# Altium PCB PCB1.PcbDoc
Units mm, origin at the board's own origin, x right, y up, seen from the top; angles counter-clockwise.
Board outline 88.5 x 69.5 mm, 2 copper layers (Top Layer, Bottom Layer); 11 components, 28 nets, 93 pads, 0 vias.
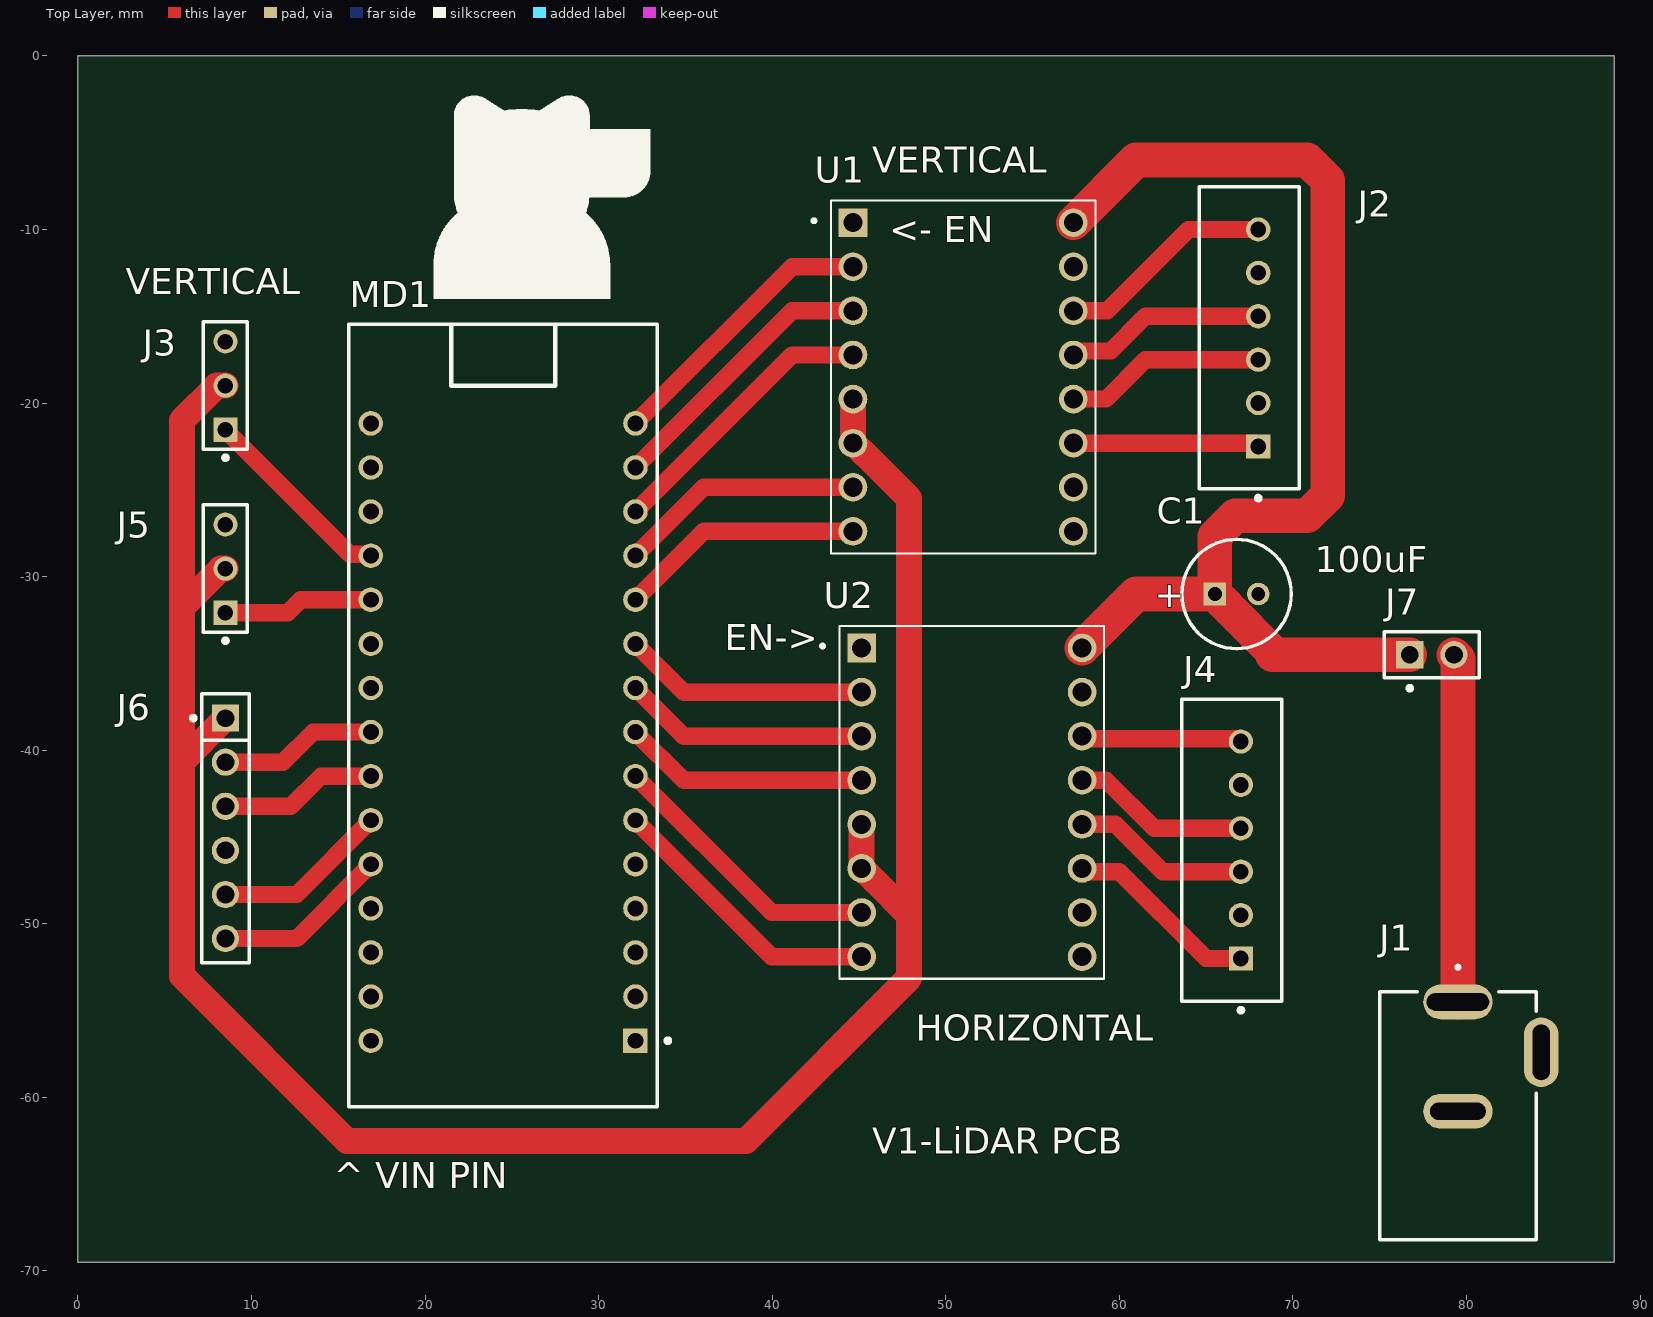
[diagram p0: Top Layer view]
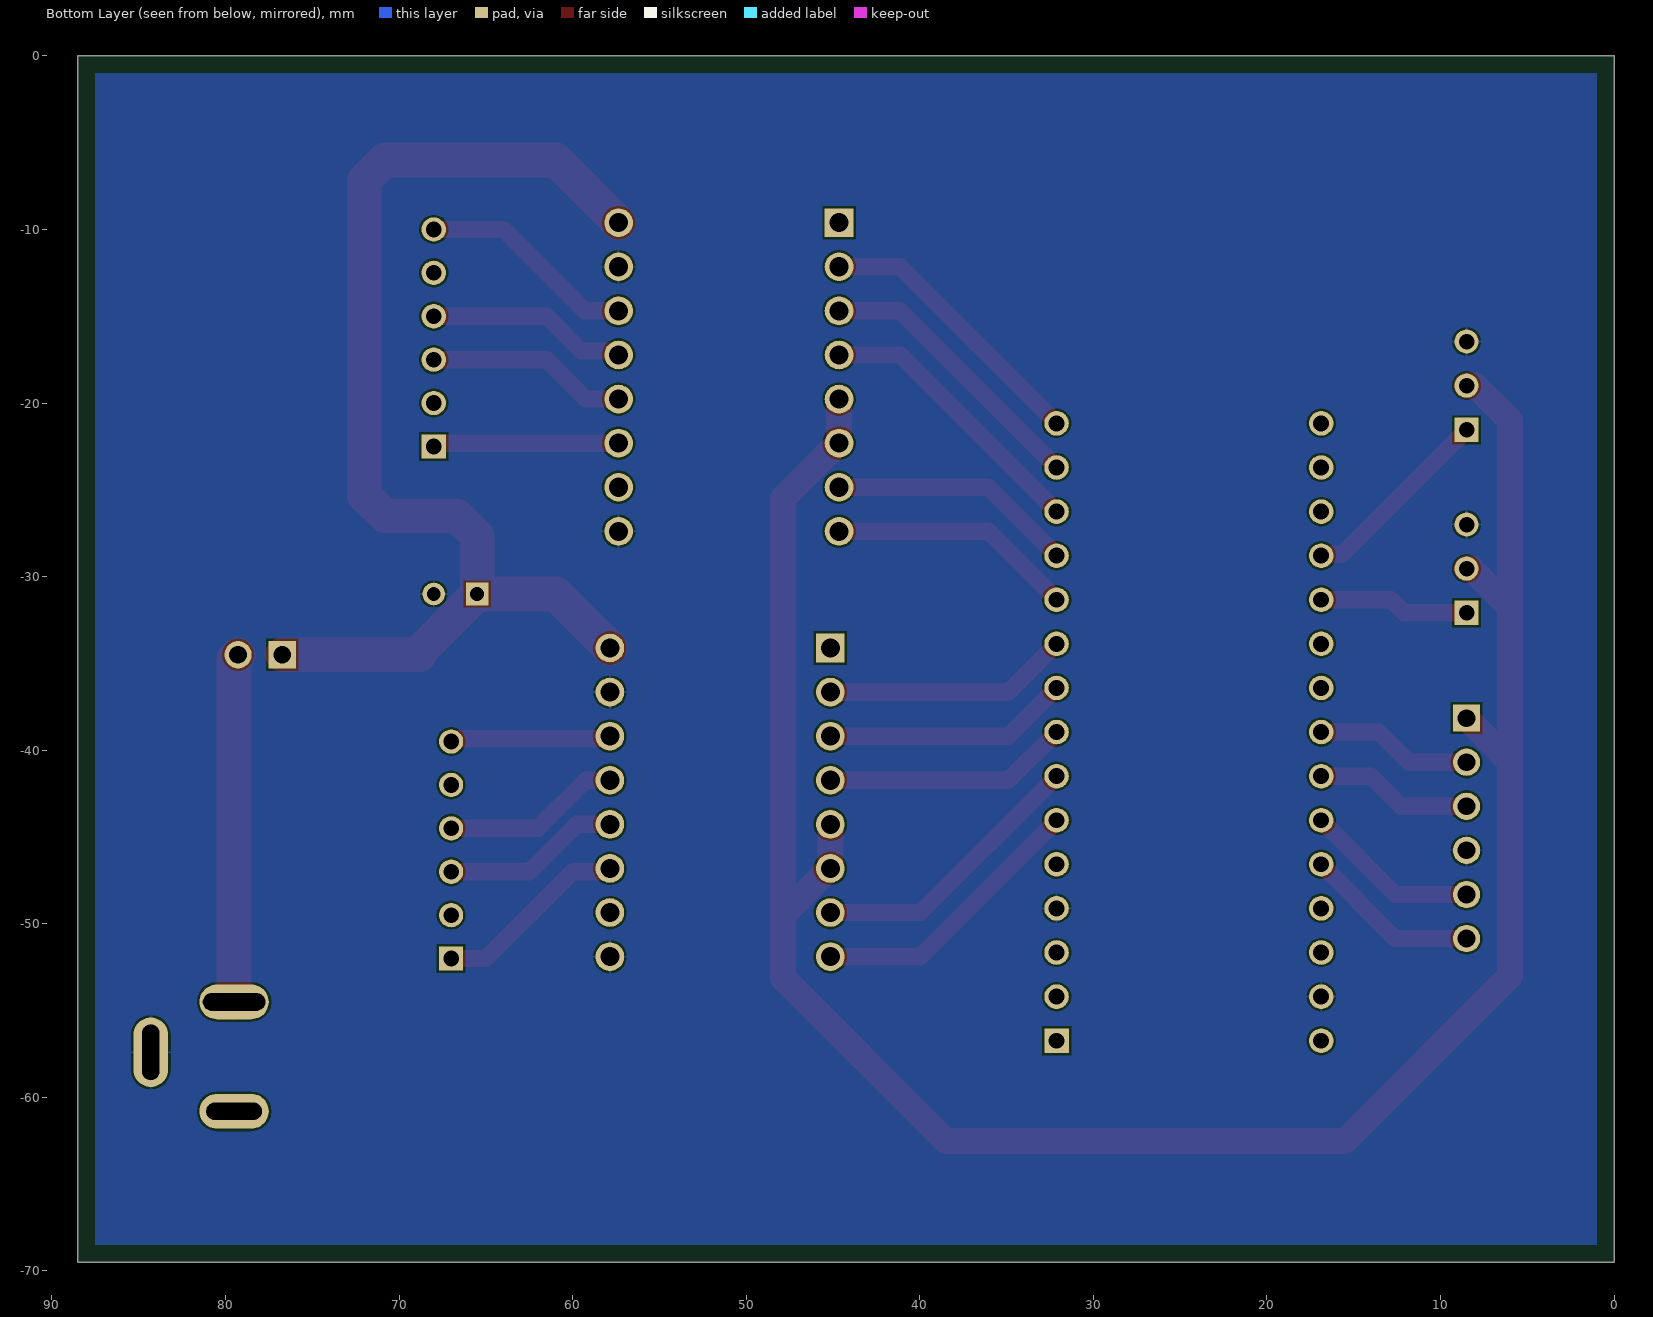
[diagram p1: Bottom Layer view, seen from below]
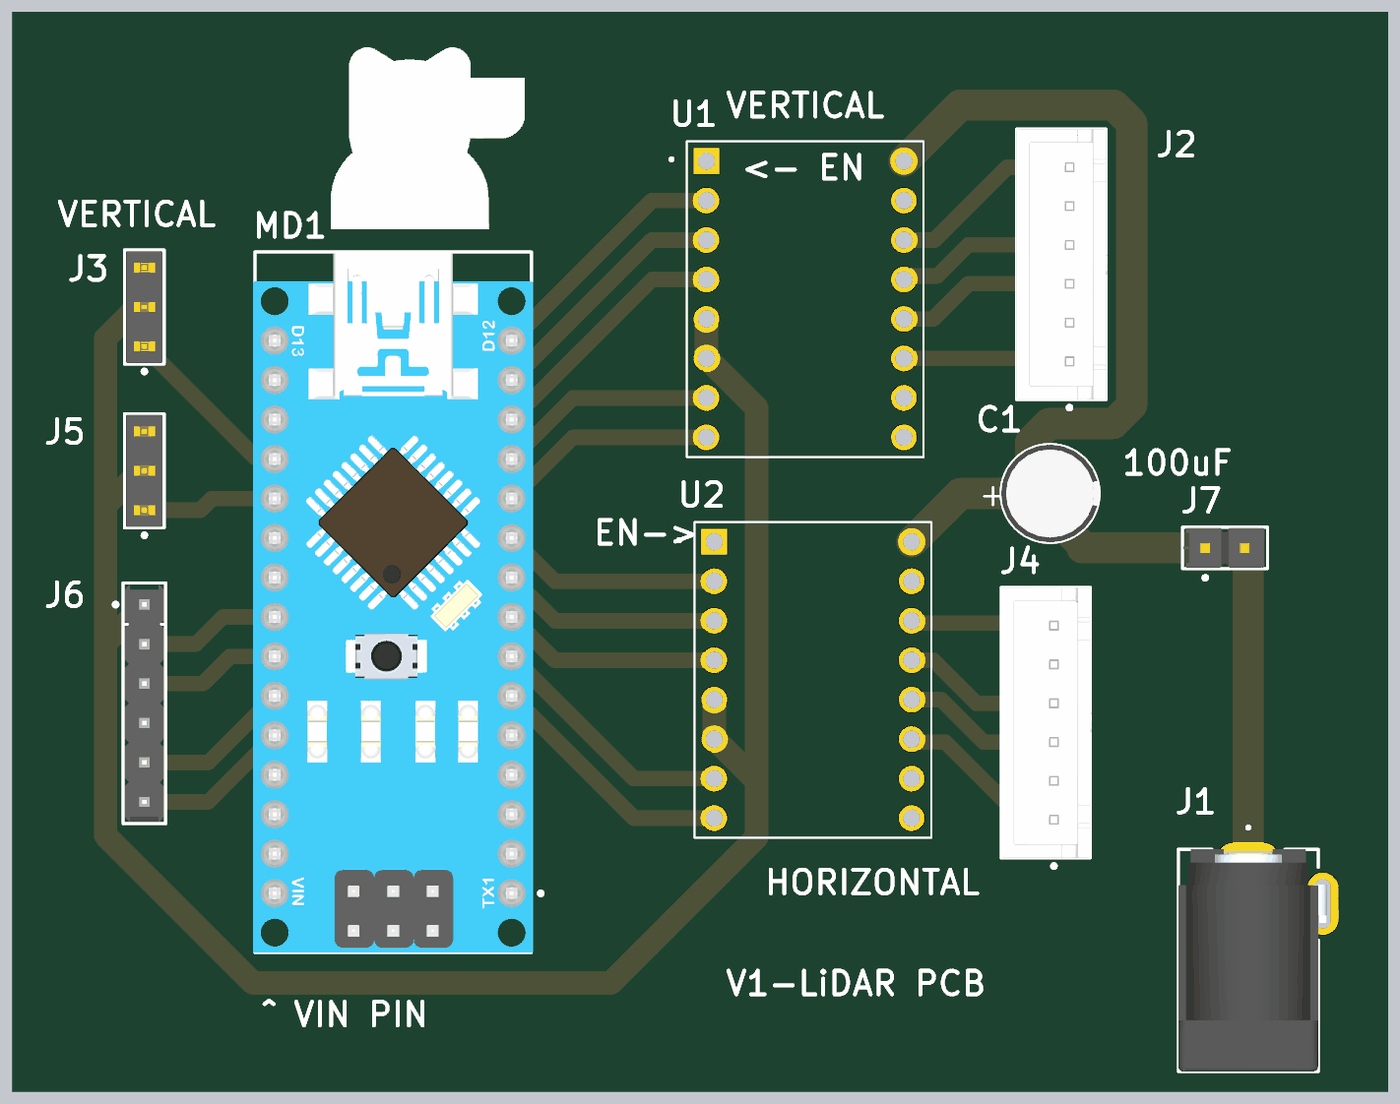
[diagram p2: 3D render of the assembled board from above, using the file's embedded part models]

## Layer stack, top to bottom
Top Solder: solder mask 0.0102, Solder Resist, Dk 3.5
Top Layer: signal copper 0.0356
Dielectric 1: dielectric 0.32, FR-4, Dk 4.8
Bottom Layer: signal copper 0.0356
Bottom Solder: solder mask 0.0102, Solder Resist, Dk 3.5

## Board outline
0,-69.5 0,0 88.5,0 88.5,-69.5

## Design rules (kind name [scope] priority, off if disabled: settings)
BoardOutlineClearance [All] p1: gap=0.2 ignorepadtopadclearanceinfootprint=FALSE
Clearance [All] p1: gap=0.127 ignorepadtopadclearanceinfootprint=TRUE except(0.254: Arc-Hole Track-Hole SMDPad-Hole THPad-Hole Via-Hole Fill-Hole Poly-Hole Region-Hole Text-Hole)
ComponentClearance [All] p1: gap=0.127 collisioncheckmode=3 verticalgap=0.127 showdistances=TRUE
DiffPairsRouting [All] p1: maxlimit=0.254 minlimit=0.127 mostfreqgap=0.127 toplayer_minwidth=0.127 toplayer_maxwidth=25.4 toplayer_prefwidth=0.127 bottomlayer_minwidth=0.127 bottomlayer_maxwidth=25.4 bottomlayer_prefwidth=0.127 maxuncoupledlength=12.7
Height [All] p1: minheight=0 maxheight=1816.048 prefheight=12.7
HoleSize [All] p1: absolutevalues=TRUE maxlimit=6.3 minlimit=0.3 maxpercent=80.000 minpercent=20.000
HoleToHoleClearance [All] p1: gap=0.254 allowstackedmicrovias=FALSE
MinimumAnnularRing [All] p1: minimumring=0.152
MinimumSolderMaskSliver [All] p1: minsoldermaskwidth=0.152
PlaneClearance [All] p1: clearance=0.127
PlaneConnect PlaneConnectPowerPads [InPadClass('PowerPads')] p1: planeconnectstyle=Direct reliefexpansion=0.508 reliefentries=4 reliefconductorwidth=0.254 reliefairgap=0.254
PlaneConnect [All] p2: pad.planeconnectstyle=Relief pad.reliefexpansion=0.3 pad.reliefentries=4 pad.reliefconductorwidth=0.127 pad.reliefairgap=0.127 via.planeconnectstyle=Direct via.reliefexpansion=0.3 via.reliefentries=4 via.reliefconductorwidth=0.127 via.reliefairgap=0.127
PolygonConnect PolygonConnectPowerPads [All vs (InPadClass('PowerPads'))] p1: connectstyle=Direct reliefconductorwidth=0.254 reliefentries=4 polygonreliefangle="90 Angle" airgapwidth=0.254
PolygonConnect [All] p2: thpad.connectstyle=Relief thpad.reliefconductorwidth=0.127 thpad.reliefentries=4 thpad.polygonreliefangle="90 Angle" thpad.airgapwidth=0.127 smdpad.connectstyle=Relief smdpad.reliefconductorwidth=0.127 smdpad.reliefentries=4 smdpad.polygonreliefangle="90 Angle" smdpad.airgapwidth=0.127 via.connectstyle=Direct via.reliefconductorwidth=0.127 via.reliefentries=4 via.polygonreliefangle="90 Angle" via.airgapwidth=0.127
RoutingVias [All] p1: holewidth=0.3 width=0.6 viastyle="Through Hole" minholewidth=0.3 minwidth=0.6 maxholewidth=0.6 maxwidth=6.6
SilkToSilkClearance [All] p1: silktosilkclearance=0.127
SilkToSolderMaskClearance [IsPad] p1: minsilkscreentomaskgap=0.127 clearancetoexposedcopper=TRUE
SolderMaskExpansion [All] p1: expansion=0.051 istentingtop=FALSE
UnRoutedNet [All] p1: checkbadconnections=TRUE
Width Width_10mil [All] p1: maxlimit=25.4 minlimit=0.254 preferedwidth=0.254 minimp=50.000000 maximp=50.000000 favimp=50.000000
Width Width_6mil [All] p2: maxlimit=25.4 minlimit=0.152 preferedwidth=0.152 minimp=50.000000 maximp=50.000000 favimp=50.000000
Width Power_20mil [All] p3: maxlimit=25.4 minlimit=0.508 preferedwidth=0.508 minimp=50.000000 maximp=50.000000 favimp=50.000000
Width Power_12mil [All] p4: maxlimit=25.4 minlimit=0.305 preferedwidth=0.305 minimp=50.000000 maximp=50.000000 favimp=50.000000
Width Width_5mil [All] p5: maxlimit=25.4 minlimit=0.127 preferedwidth=0.127 minimp=50.000000 maximp=50.000000 favimp=50.000000
19 further rules are at their usual default settings.

## Components (designator, comment, footprint, x,y, rotation, side; value= is the part's Value field where it differs from the comment)
C1 "100_uF_ELECTROLYTIC" CAPPR55-250-1120X630X1220 66.75,-31 r0 top
J1 "DC-005 5.5x2.5mm" GCT_DCJ250-10-A-XX-X_REVA 79.5,-61.05 r0 top
J2 "XH-6 NEMA V" FP-B6B-XH-A_LF_SN-MFG 67.475,-16.25 r90 top
J3 "KY-003_HORIZONTAL" FP-87224-3-MFG 8.5,-19 r90 top
J4 "XH-6 NEMA H" FP-B6B-XH-A_LF_SN-MFG 66.475,-45.75 r90 top
J5 "KY-003_VERTICAL" FP-87224-3-MFG 8.5,-29.54 r90 top
J6 "TF_LUNA" FP-22-28-4060-MFG 8.5,-44.5 r270 top
J7 "SWITCH" FP-TSW-102-07-S-S-MFG 78,-34.5 r0 top
MD1 "ARDUINO NANO" FP-A000005-MFG 24.5,-38 r180 top
U1 "DRV8825_STEPPER_MOTOR_DRIVER_CARRIER_VERTICAL" IC_DRV8825_STEPPER_MOTOR_DRIVER_CARRIER 51,-18.5 r0 top
U2 "DRV8825_STEPPER_MOTOR_DRIVER_CARRIER_HORIZONTAL" IC_DRV8825_STEPPER_MOTOR_DRIVER_CARRIER 51.5,-43 r0 top

## Footprints (in the part's own frame and the unit in brackets; to place one, negate y for a bottom-side part, rotate by r counter-clockwise, add the part's x,y. Pads: shape width x height; smd on the part's side, far side on the other; paste and mask are expansions set on the pad)
CAPPR55-250-1120X630X1220 [mm] "THD, 2-Leads, Dia 6.3mm, Body Length 11.2mm"
  rect 1.3x1.3 hole 0.8: 1(-1.25,0)
  round 1.3 hole 0.8: 2(1.25,0)
  silkscreen extent -3.15,-3.15 3.15,3.15, body extent -3.15,-3.15 3.16,3.15, height 12.21
FP-22-28-4060-MFG [mm]
  rect 1.57x1.57 hole 1.02 paste-2539.97 mask+0: 1(-6.35,0)
  round 1.57 hole 1.02 paste-2539.97 mask+0: 2(-3.81,0) 3(-1.27,0) 4(1.27,0) 5(3.81,0) 6(6.35,0)
  silkscreen extent -7.75,-1.97 7.75,1.37, body extent -7.85,-1.47 7.85,1.47, height 0.25
FP-87224-3-MFG [mil]
  rect 54.69x54.69 hole 35 paste-99999 mask+0: 1(-100,0)
  round 54.69 hole 35 paste-99999 mask+0: 2(0,0) 3(100,0)
  silkscreen extent -168,-50 145,50, body extent -148,-54 148,54, height 10
FP-A000005-MFG [mil]
  rect 55.67x55.67 hole 35.98 paste-99999 mask+0: 1(-300,737.5)
  round 55.67 hole 35.98 paste-99999 mask+0: 2(-300,637.5) 3(-300,537.5) 4(-300,437.5) 5(-300,337.5) 6(-300,237.5) 7(-300,137.5) 8(-300,37.5) 9(-300,-62.5) 10(-300,-162.5) 11(-300,-262.5) 12(-300,-362.5) 13(-300,-462.5) 14(-300,-562.5) 15(-300,-662.5) 16(300,-662.5) 17(300,-562.5) 18(300,-462.5) 19(300,-362.5) 20(300,-262.5) 21(300,-162.5) 22(300,-62.5) 23(300,37.5) 24(300,137.5) 25(300,237.5) 26(300,337.5) 27(300,437.5) 28(300,537.5) 29(300,637.5) 30(300,737.5)
  silkscreen extent -379,-888 350,887, body extent -354,-891 354,891, height 10
FP-B6B-XH-A_LF_SN-MFG [mm]
  rect 1.4x1.4 hole 0.9 paste-2539.97 mask+0: 1(-6.25,-0.525)
  round 1.4 hole 0.9 paste-2539.97 mask+0: 2(-3.75,-0.525) 3(-1.25,-0.525) 4(1.25,-0.525) 5(3.75,-0.525) 6(6.25,-0.525)
  silkscreen extent -9.35,-2.88 8.7,2.88, body extent -8.7,-2.98 8.7,2.88, height 7
FP-TSW-102-07-S-S-MFG [mm]
  rect 1.57x1.57 hole 1.02 paste-2539.97 mask+0: 1(-1.27,0)
  round 1.57 hole 1.02 paste-2539.97 mask+0: 2(1.27,0)
  silkscreen extent -2.73,-2.05 2.73,1.34, body extent -2.83,-1.44 2.83,1.44, height 0.25
GCT_DCJ250-10-A-XX-X_REVA [mm]
  oval 4x2 hole 1 slot 3.6 at 0 deg: 1(0,6.55)
  oval 4x2 hole 1 slot 3.2 at 0 deg: 2(0,0.25)
  oval 2x4 hole 1 slot 3.2 at 90 deg: 3(4.8,3.65)
  silkscreen extent -4.5,-7.15 4.5,8.65, body extent -4.5,-7.15 5.05,7.15, height 11
IC_DRV8825_STEPPER_MOTOR_DRIVER_CARRIER [mm]
  rect 1.65x1.65 hole 1.1: 1(-6.35,8.89)
  round 1.65 hole 1.1: 2(-6.35,6.35) 3(-6.35,3.81) 4(-6.35,1.27) 5(-6.35,-1.27) 6(-6.35,-3.81) 7(-6.35,-6.35) 8(-6.35,-8.89) 9(6.35,-8.89) 10(6.35,-6.35) 11(6.35,-3.81) 12(6.35,-1.27) 13(6.35,1.27) 14(6.35,3.81) 15(6.35,6.35) 16(6.35,8.89)
  silkscreen extent -8.7,-10.16 7.62,10.16

## Part data
C1: library part CMP-1665-00015-4, "Aluminum Electrolytic Capacitor (Radial Lead Type), 100 uF, 35 V, -40 to 85 degC, 2-Pin THD, RoHS, Bulk", Manufacturer=Panasonic, Max Operating Temperature="85 degC", Min Operating Temperature="-40 degC", Package Quantity=200, Voltage Rating="35 V", ComponentLink1Description="Manufacturer URL", ComponentLink1URL=http://www.panasonic.com/, ComponentLink2Description=Datasheet, ComponentLink2URL=http://industrial.panasonic.com/cdbs/www-data/pdf/RDF0000/ABA0000C1047.pdf, DatasheetVersion=03/2016, Height="11.2 mm", Lead Pitch="2.5 mm", Length="11.2 mm", Mount="Through Hole", Mounting Technology="Through Hole", PackageDescription="2-Pin Through Hole Device, Dia 6.3 mm, Body Length 11.2 mm", PackageReference=Radial, Packaging=Bulk, Pins=2, REACH SVHC="No SVHC", RoHSCompliant=true
J1: library part DCJ250-10-A-XX-X_REVA, "Power Barrel Connector Jack 2.55mm ID (0.100), 5.50mm OD (0.217) Through Hole, Right Angle", Package=None, Availability="In Stock", Check_prices=https://www.snapeda.com/parts/DCJ250-10-A-K1-K/Global+Connector+Technology/view-part/?ref=eda, MF="Global Connector Technology", MP=DCJ250-10-A-K1-K, Price=None, Purchase-URL=https://pricing.snapeda.com/search/part/DCJ250-10-A-K1-K/?ref=eda, SnapEDA_Link=https://www.snapeda.com/parts/DCJ250-10-A-K1-K/Global+Connector+Technology/view-part/?ref=snap
J2 J4: library part CMP-17439-000076-1, "CONN HEADER VERT 6POS 2.5MM"
J3 J5: library part CMP-2000-05697-2, "CONN HEADER VERT 3POS 2.54MM", Color=Black, Contact Current Rating=3A, Flammability Rating="UL94 V-0", High Temperature Housing=No, Max Operating Temperature=105°C, Min Operating Temperature=-65°C, Package Quantity=520, Approvals=CSA, Board Standoff="No (Without)", Connector Type=Plug, Contact Gender=Male, Contact Material=Bronze, Contact Mating Length=8.08mm, Contact Plating=Gold, Contact Post Length=0.125inch, Contact Protection="No (Without)", Contact Shape=Square, Contact Type="Male Pin", Current Rating=3A, Depth=2.54mm, ELV=Compliant, Gasket="No (Without)", High Speed Serial Data Connector=No, Housing Color=Black, Housing Material=Thermoplastic, Keyed=No, Lead Free="Lead Free", Length=7.21mm, Mating Alignment="No (Without)", Mating Connector Lock="No (Without)", Mount="Through Hole", Number of Contacts=3, Number of Positions=3, Number of Rows=1, Orientation=Straight, Packaging=Carton, PCB Mount Retention=Without, PCB Mounting Orientation=Vertical, PCB Thickness=1.397mm, Pitch=2.54mm, Radiation Hardening=No, RoHS Compliant=Yes, Row Spacing=2.54mm, Selectively Loaded="No (Without)", Series="AMPMODU MOD II", Stabilizers="No (Without)", Strain Relief="No (Without)", Termination="Through Hole"
J6: library part CMP-04776-000763-1, "CONN HEADER VERT 6POS 2.54MM", Color=Black, Contact Resistance=20mR, Current Rating=4A, Max Operating Temperature=75°C, Max Voltage Rating (AC)=250V, Max Voltage Rating (DC)=250.25kV, Min Operating Temperature=0°C, Package Quantity=1, Connector Type="Male Pin", Contact Material=Brass, Contact Mating Length=0.24inch, Contact Plating=Tin, Contact Type="Male Pin", Depth=2.49mm, Gender=Male, Housing Color=Black, Housing Material=Thermoplastic, Length=15.24mm, Mount="Through Hole", Number of Contacts=6, Number of Positions=6, Number of Rows=1, Orientation=Straight, Packaging=Bulk, Pitch=2.54mm, RoHS Compliant=Yes, Series="KK® 42375", Termination=Solder, Voltage Rating=250V
J7: library part CMP-1681-00004-5, "CONN HEADER VERT 2POS 2.54MM", Color=Black, Flammability Rating="UL94 V-0", Max Current Rating=7.6A, Max Operating Temperature=125°C, Max Voltage Rating (AC)=550V, Min Operating Temperature=-55°C, Package Quantity=1, Connector Type=Header, Contact Finish - Mating=GOLD, Contact Material=Bronze, Contact Mating Length=0.23inch, Contact Plating=Gold, Contact Shape=Square, Contact Type="Male Pin", Depth=2.54mm, Fastening Type=Pull, Gender=Male, Housing Color=Black, Housing Material=Polyester, Insulation Color=Black, Insulation Material=PBT, Lead Free="Lead Free", Length=5.08mm, Mount="Through Hole", Number of Contacts=2, Number of Positions=2, Number of Rows=1, Orientation=Straight, Packaging=Bulk, Pitch=2.54mm, Radiation Hardening=No, REACH SVHC="No SVHC", RoHS Compliant=Yes, Series=TSW, Termination=Solder, Width=2.54mm
MD1: library part CMP-189986-000002-1, "ARDUINO NANO ATMEGA328 EVAL BRD", Operating Supply Voltage=12V, Package Quantity=50, Core Architecture=AVR, Data Bus Width=8b, Evaluation Kit=Yes, Height=0.25inch, Interface=I2C, Length=7inch, Number of Bits=8, Packaging=Bulk, REACH SVHC="No SVHC", Series="AVR® ATmega", Weight=0.358383oz, Width=5inch
U1 U2: library part DRV8825_STEPPER_MOTOR_DRIVER_CARRIER, "Stepper motor controler; IC: DRV8825; 1.5A; Uin mot: 8.2Ã·45V", Package=None, Availability=Unavailable, MP=DRV8825_STEPPER_MOTOR_DRIVER_CARRIER, Price=None

## Nets (pads, with @x,y where several pads share a name; then routed paths per layer and width w, separated by ;. In a path a pad name is that pad's centre, name@x,y a point inside that pad or via, vN(x,y) a via of type N, cw(c..) or ccw(c..) an arc to the next point about the centre after c; other vN are vias at no path point)
5V: J3.2 J5.2 J6.1 U1.5 U1.6 U2.5 U2.6 | length 133.1
  Top Layer w1.5: J6.1 6,-40.65 ; J5.2 8.231,-29.54 6,-31.771 ; J3.2 8,-19 6,-21 6,-31.771 ; U1.5 U1.6 44.691,-22.31 45.402,-23.021 45.408,-23.021 47.879,-25.492 47.879,-49.492 ; U2.5 U2.6 45.191,-46.81 45.902,-47.521 45.908,-47.521 47.879,-49.492 ; 6,-40.65 6,-31.771 ; 6,-40.65 6,-53 15.5,-62.5 38.5,-62.5 47.879,-53.121 47.879,-49.492
12V: C1.1 J7.1 U1.16 U2.16 | length 67.3
  Top Layer w2: U1.16 60.96,-6 70.828,-6 72,-7.172 72,-25.328 70.828,-26.5 66.672,-26.5 65.5,-27.672 C1.1 ; U2.16 60.96,-31 C1.1 ; J7.1 68.807,-34.5 68.807,-34.32 66.223,-31.736 66.223,-31.723 C1.1
CFG: J6.5 MD1.25 | length 10.2
  Top Layer w1: J6.5 12.603,-48.31 MD1.25
DIR_H: MD1.6 U2.8 | length 16.3
  Top Layer w1: MD1.6 39.978,-51.89 U2.8
DIR_V: MD1.11 U1.8 | length 14.2
  Top Layer w1: MD1.11 36.063,-27.39 U1.8
GND: C1.2 J1.3 J3.3 J5.3 J6.4 MD1.4 MD1.29 U1.9 U1.15 U2.9 U2.15
KY_H: J5.1 MD1.20 | length 8.7
  Top Layer w1: J5.1 12.085,-32.08 12.832,-31.333 MD1.20
KY_V: J3.1 MD1.19 | length 11.4
  Top Layer w1: J3.1 15.673,-28.713 16.801,-28.713 MD1.19
M0_H: MD1.10 U2.2 | length 14.2
  Top Layer w1: MD1.10 34.898,-36.65 U2.2
M0_V: MD1.15 U1.2 | length 16.3
  Top Layer w1: MD1.15 41.143,-12.15 U1.2
M1_H: MD1.9 U2.3 | length 14.2
  Top Layer w1: MD1.9 34.898,-39.19 U2.3
M1_V: MD1.14 U1.3 | length 16.3
  Top Layer w1: MD1.14 41.143,-14.69 U1.3
M2_H: MD1.8 U2.4 | length 14.2
  Top Layer w1: MD1.8 34.898,-41.73 U2.4
M2_V: MD1.13 U1.4 | length 16.3
  Top Layer w1: MD1.13 41.143,-17.23 U1.4
MUX: J6.6 MD1.26 | length 10.2
  Top Layer w1: J6.6 12.603,-50.85 MD1.26
NetJ1_1: J1.1 J7.2 | length 20.1
  Top Layer w2: J7.2 79.5,-34.73 J1.1
NetJ2_1: J2.1 U1.11 | length 10.7
  Top Layer w1: U1.11 67.81,-22.31 J2.1
NetJ2_3: J2.3 U1.12 | length 11.6
  Top Layer w1: U1.12 59.23,-19.77 61.5,-17.5 J2.3
NetJ2_4: J2.4 U1.13 | length 11.6
  Top Layer w1: U1.13 57.58,-17 59.5,-17 61.5,-15 J2.4
NetJ2_6: J2.6 U1.14 | length 12.6
  Top Layer w1: U1.14 59.31,-14.69 64,-10 J2.6
NetJ4_1: J4.1 U2.11 | length 11.3
  Top Layer w1: U2.11 58.04,-47 60,-47 65,-52 J4.1
NetJ4_3: J4.3 U2.12 | length 10.3
  Top Layer w1: U2.12 59.77,-44.27 62.5,-47 J4.3
NetJ4_4: J4.4 U2.13 | length 10.3
  Top Layer w1: U2.13 59.23,-41.73 62,-44.5 J4.4
NetJ4_6: J4.6 U2.14 | length 9.3
  Top Layer w1: U2.14 58.005,-39.345 66.845,-39.345 J4.6
SCL: J6.3 MD1.24 | length 9.1
  Top Layer w1: J6.3 12.27,-43.23 14.008,-41.493 MD1.24
SDA: J6.2 MD1.23 | length 9.1
  Top Layer w1: J6.2 11.81,-40.69 13.548,-38.953 MD1.23
STEP_H: MD1.7 U2.7 | length 16.3
  Top Layer w1: MD1.7 39.978,-49.35 U2.7
STEP_V: MD1.12 U1.7 | length 14.2
  Top Layer w1: MD1.12 36.063,-24.85 U1.7
pads on no net: J1.2 J2.2 J2.5 J4.2 J4.5 MD1.1 MD1.2 MD1.3 MD1.5 MD1.16 MD1.17 MD1.18 MD1.21 MD1.22 MD1.27 MD1.28 MD1.30 U1.1 U1.10 U2.1 U2.10

## Polygon pours and split planes (outlines as drawn)
GND on Bottom Layer "GND_L02_P000" (solid, pour order 0): 1,-68.5 1,-1 87.5,-1 87.5,-68.5

## Silkscreen, mask and mechanical layers (free items; w line width, h text height)
Top Overlay:
  drawing of 5 lines, arcs and shapes, not listed
  text "VERTICAL" at 45.754,-6.746 h1.52
  text "<- EN" at 46.754,-10.746 h1.52
  text "VERTICAL" at 2.754,-13.746 h1.52
  text "100uF" at 71.254,-29.746 h1.52
  text "EN->" at 37.254,-34.246 h1.52
  text "HORIZONTAL" at 48.254,-56.746 h1.52
  text "V1-LiDAR PCB" at 45.754,-63.246 h1.52
  text "^ VIN PIN" at 14.754,-65.246 h1.52
Mechanical 1:
  lines w0.254: 0,0 88.5,0 88.5,-69.5 0,-69.5 0,0 ; 0,0 0,0

## Text inside footprints (layer, text, board x,y; h text height)
C1: Top Overlay "+" at 62.05,-31.75 h1.5